# Altium PCB PCB.PcbDoc
Units mm, origin at the board's own origin, x right, y up, seen from the top; angles counter-clockwise.
Board outline 60.13 x 40 mm, 2 copper layers (Top Layer, Bottom Layer); 9 components, 7 nets, 24 pads, 0 vias.
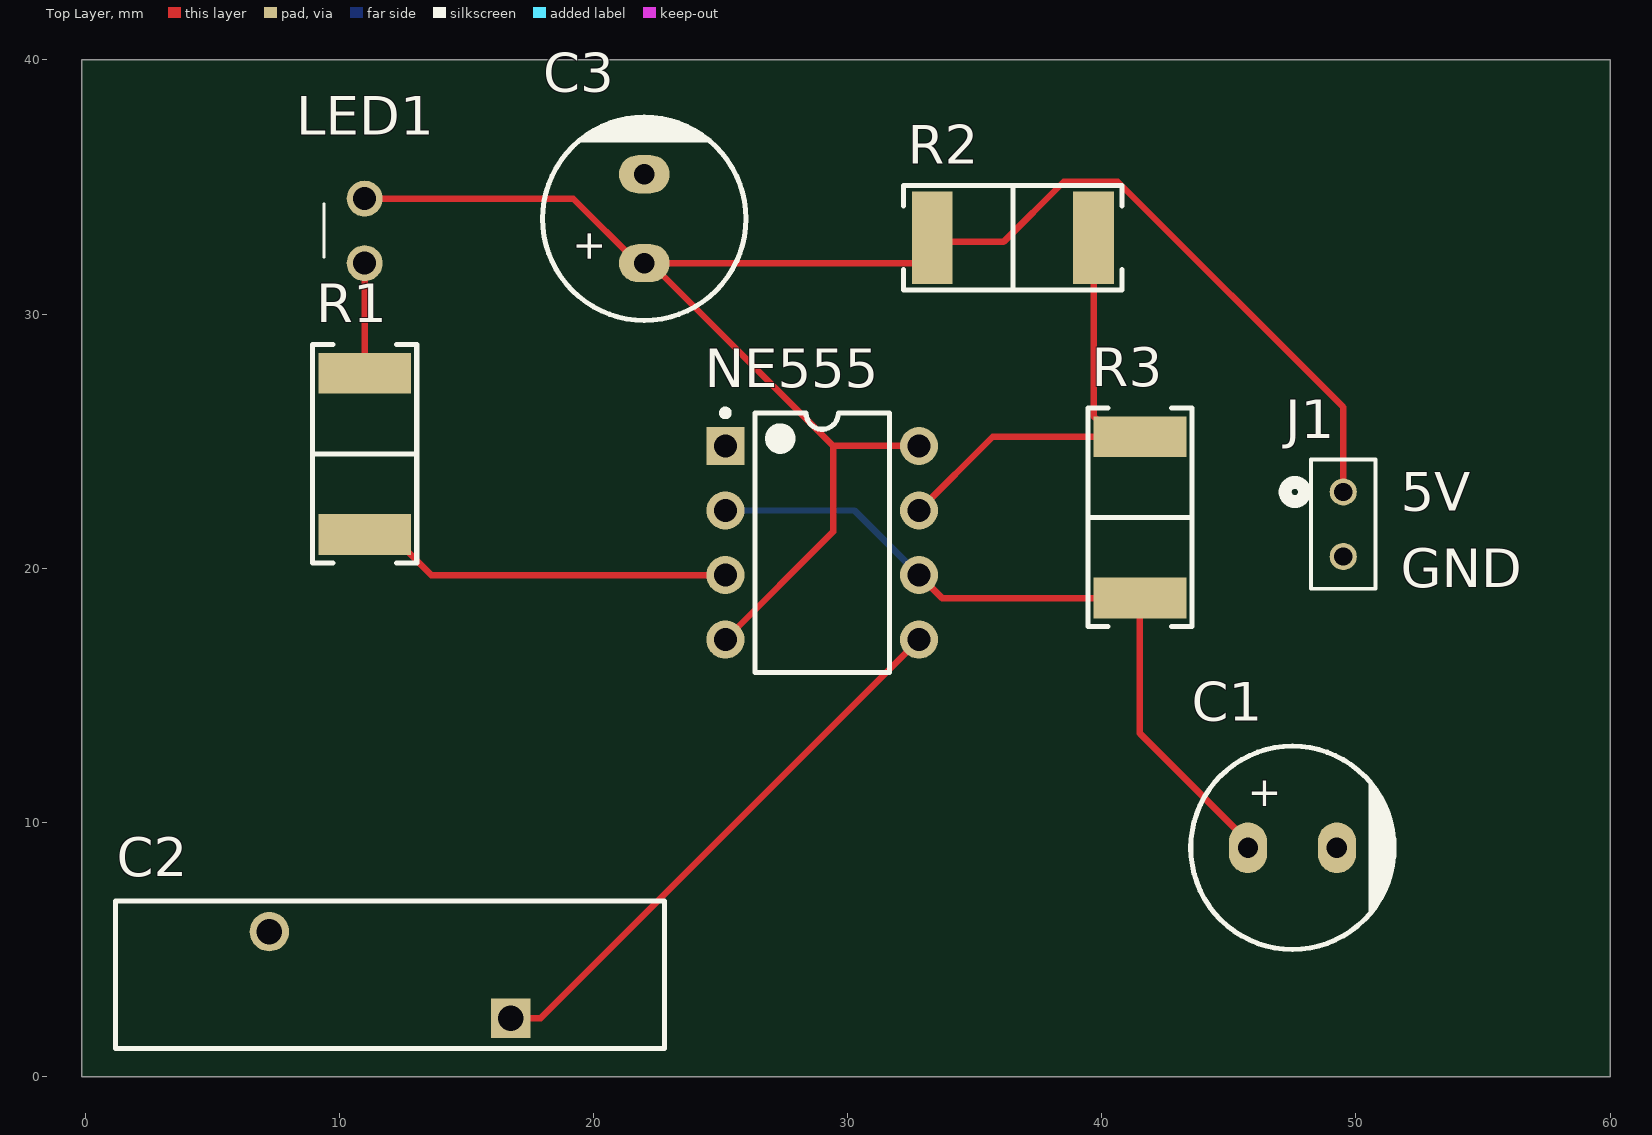
[diagram p0: Top Layer view]
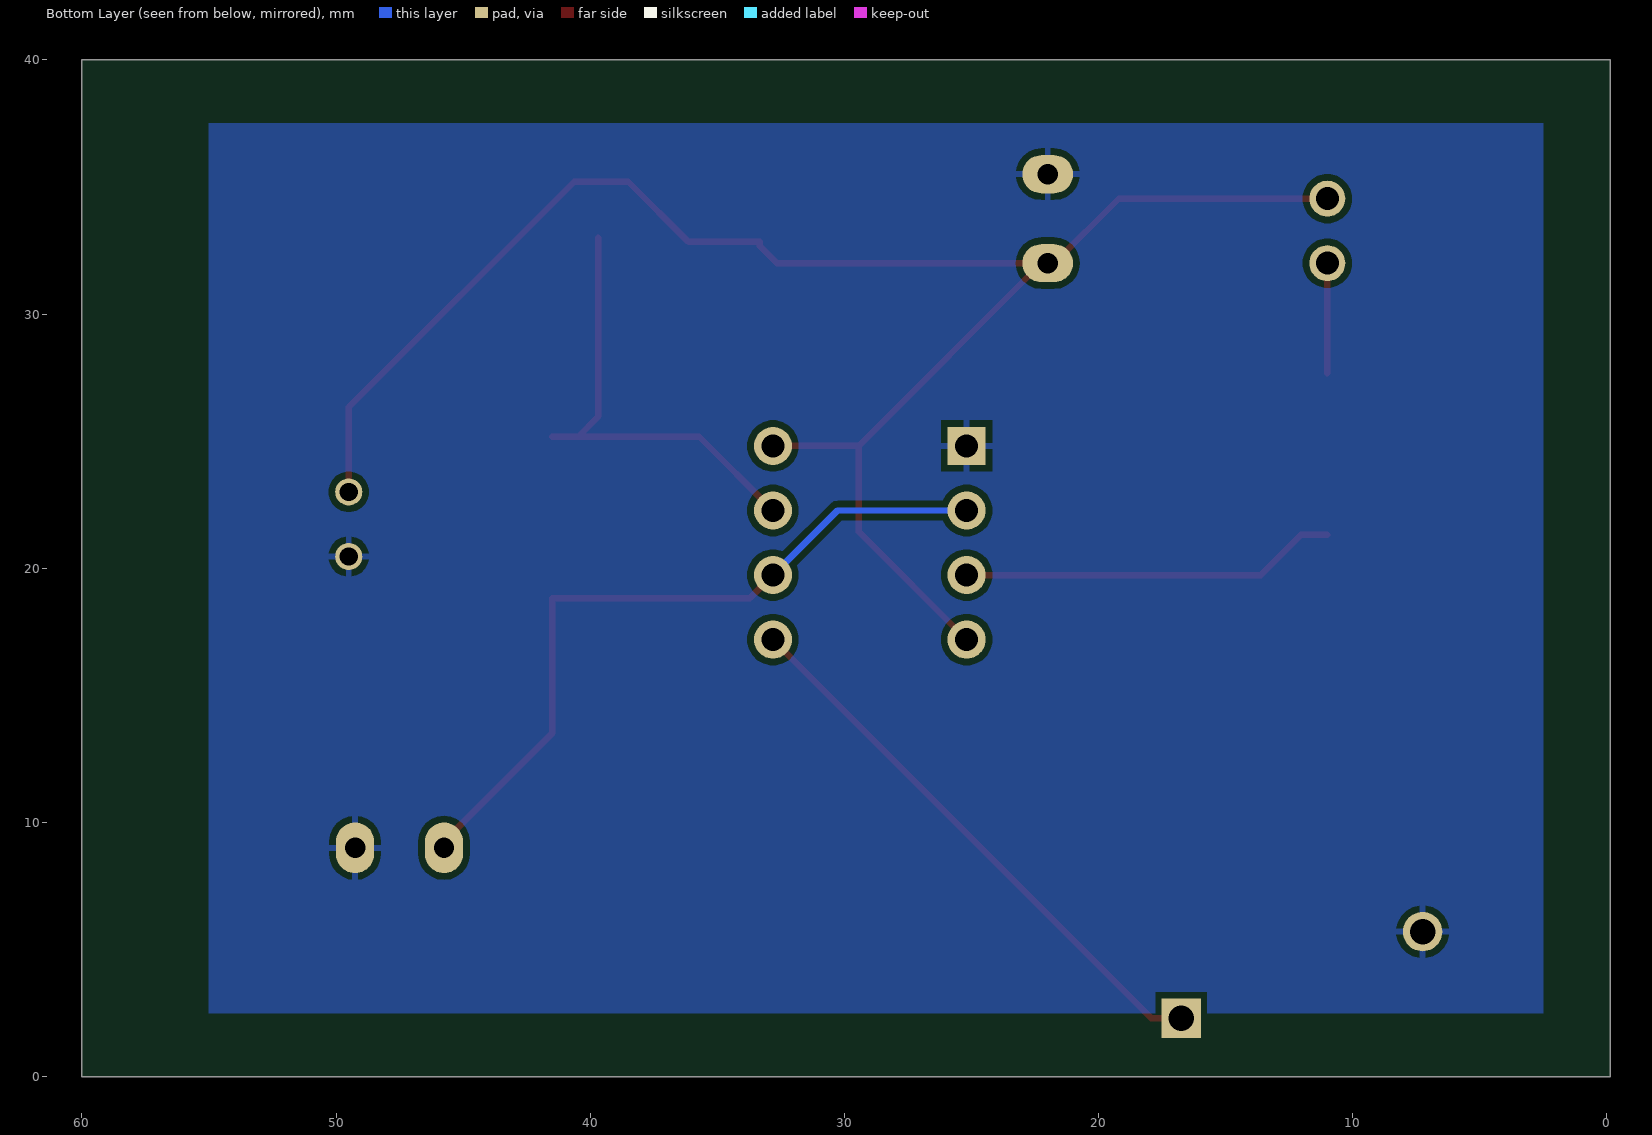
[diagram p1: Bottom Layer view, seen from below]
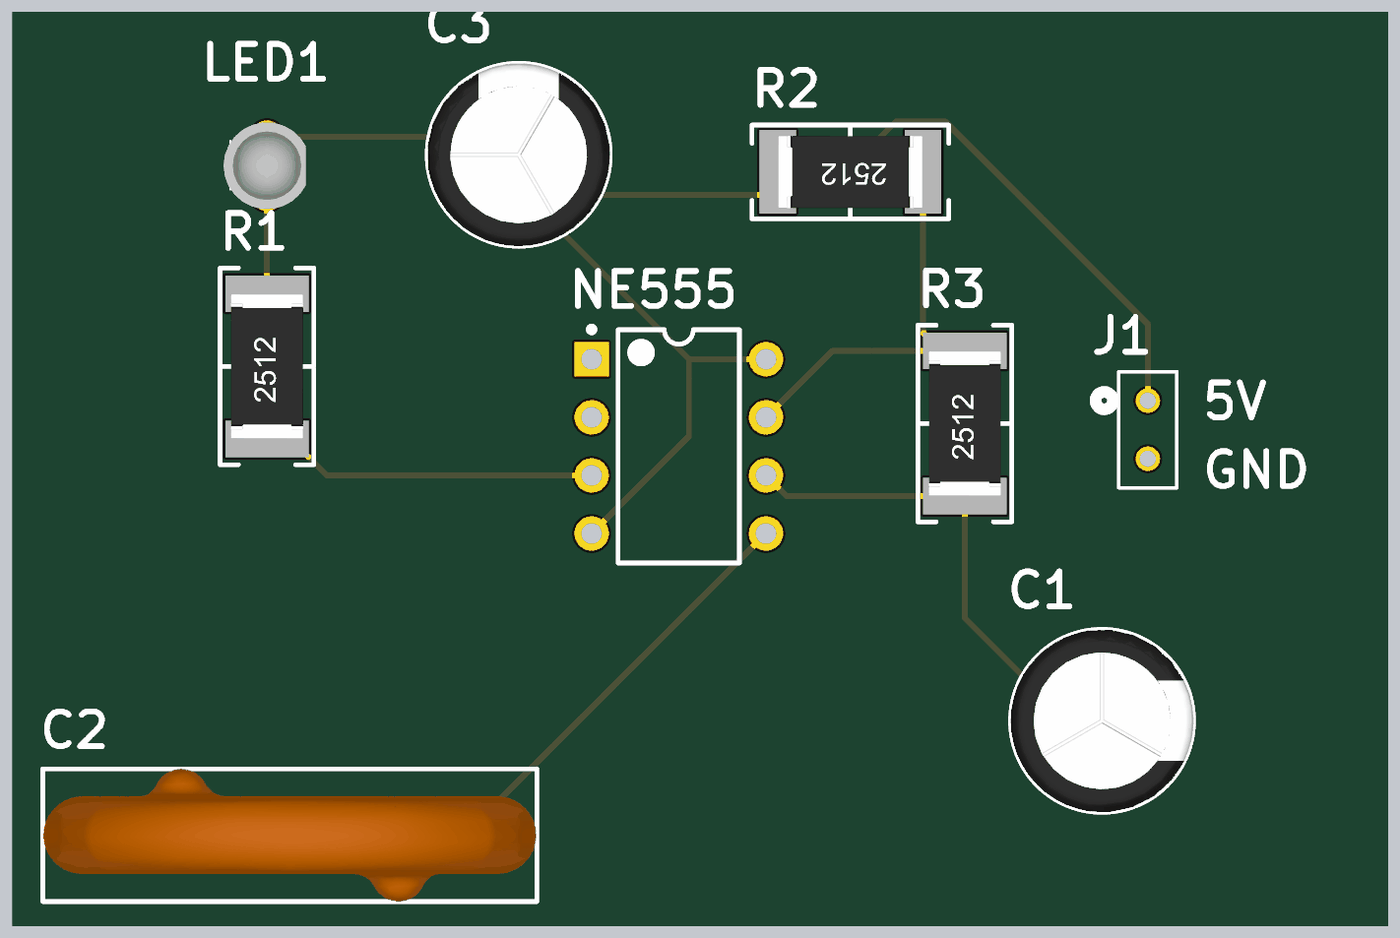
[diagram p2: 3D render of the assembled board from above, using the file's embedded part models]

## Layer stack, top to bottom
Top Solder: solder mask 0.0102, Solder Resist, Dk 3.5
Top Layer: signal copper 0.0356
Dielectric 1: dielectric 0.32, FR-4, Dk 4.8
Bottom Layer: signal copper 0.0356
Bottom Solder: solder mask 0.0102, Solder Resist, Dk 3.5

## Board outline
-0.127,0 60,0 60,40 -0.127,40

## Design rules (kind name [scope] priority, off if disabled: settings)
Clearance [All] p1: gap=0.254 ignorepadtopadclearanceinfootprint=FALSE except(0: Arc-Hole Track-Hole SMDPad-Hole THPad-Hole Via-Hole Fill-Hole Poly-Hole Region-Hole Text-Hole)
PolygonConnect [All] p1: connectstyle=Relief reliefconductorwidth=0.254 reliefentries=4 polygonreliefangle="90 Angle" airgapwidth=0.254
RoutingVias [All] p1: holewidth=0.711 width=1.27 viastyle="Through Hole" minholewidth=0.711 minwidth=1.27 maxholewidth=0.711 maxwidth=1.27
SolderMaskExpansion [All] p1: expansion=0.102 istentingtop=FALSE
Width [All] p1: maxlimit=0.254 minlimit=0.254 preferedwidth=0.254
30 further rules are at their usual default settings.

## Components (designator, comment, footprint, x,y, rotation, side; value= is the part's Value field where it differs from the comment)
C1 "10 µF" "CAP AL TH D8 L3.5 H12.5" 47.5,9 r0 top
C2 "440LS10-R" FP-440LS10-R-MFG 12,4 r180 top
C3 "10 µF" "CAP AL TH D8 L3.5 H12.5" 22,33.75 r90 top
J1 "TS-102-T-A" SAMTEC_TS-102-T-A 49.5,23 r270 top
LED1 "1254-10SURT_S530-A3" 125410SURTS530A3 11,34.54 r270 top
NE555 "NE555P" P0008A 29,21 r0 top
R1 "100 Ohms" "RES 2512_6432" 11,24.5 r90 top
R2 "1 kOhms" "RES 2512_6432" 36.5,33 r180 top
R3 "22 kOhms" "RES 2512_6432" 41.5,22 r90 top

## Footprints (in the part's own frame and the unit in brackets; to place one, negate y for a bottom-side part, rotate by r counter-clockwise, add the part's x,y. Pads: shape width x height; smd on the part's side, far side on the other; paste and mask are expansions set on the pad)
125410SURTS530A3 [mm]
  round 1.416 hole 0.91: 1(0,0) 2(2.54,0)
  silkscreen extent 0.2,-1.6 2.3,-1.6, body extent -0.63,-1.9 3.17,1.7, height 5.28
"CAP AL TH D8 L3.5 H12.5" [mm] "8MM Diameter, 3.5MM Lead Spacing Aluminium Capacitor"
  oval 1.5x2 hole 0.8: 1(-1.75,0) 2(1.75,0)
  silkscreen extent -4,-4 4,4, body extent -4,-4 4,4, height 11.5
FP-440LS10-R-MFG [mm]
  rect 1.55x1.55 hole 1 paste-1000 mask+0: 1(-4.75,1.7)
  round 1.55 hole 1 paste-1000 mask+0: 2(4.75,-1.7)
  silkscreen extent -10.8,-2.9 10.8,2.9, body extent -10.9,-3 10.9,3, height 0.25
P0008A [mm] "DIP, 8-Leads, Body 10.15x6.6mm, Pitch 2.54mm"
  rect 1.5x1.5 hole 0.9: 1(-3.81,3.81)
  round 1.5 hole 0.9: 2(-3.81,1.27) 3(-3.81,-1.27) 4(-3.81,-3.81) 5(3.81,-3.81) 6(3.81,-1.27) 7(3.81,1.27) 8(3.81,3.81)
  silkscreen extent -3.93,-5.1 2.65,5.23, body extent -3.95,-5.07 3.95,5.07, height 5.08
"RES 2512_6432" [mm] "Chip Resistor, 2-Leads, Body 6.30x3.15mm, IPC Medium Density"
  rect 1.6x3.65 smd: 1(-3.175,0) 2(3.175,0)
  silkscreen extent -4.3,-2.05 4.3,2.05, body extent -3.15,-1.57 3.15,1.57, height 0.7
SAMTEC_TS-102-T-A [mil]
  round 42 hole 28: 1(0,0) 2(100,0)
  silkscreen extent -50,-90 150,50

## Part data
C1 C3: library part UKL2A100MPD1TD, "CAP ALUM 10UF 20% 100V RADIAL", Device Package="Radial, Can", Lifetime @ Temp.="2000 Hrs @ 85°C", Manufacturer=Nichicon, Operating Temperature="-40°C ~ 85°C", Ripple Current @ High Frequency="180 mA @ 10 kHz", Ripple Current @ Low Frequency="90 mA @ 120 Hz", Supplier Part Number 1=493-10590-1-ND, Tolerance=±20%, Voltage - Rated="100 V", Applications="General Purpose", Capacitance="10 µF", ComponentLink1Description=Datasheet, ComponentLink1URL=http://nichicon-us.com/english/products/pdfs/e-ukl.pdf, ComponentLink2Description="DigiKey Link", ComponentLink2URL=https://www.digikey.com/en/products/detail/nichicon/UKL2A100MPD1TD/4317213, Height - Seated (Max)="0.492\" (12.50mm)", LastUpdated="10/26/2023 8:29:52 PM", Lead Spacing="0.138\" (3.50mm)", Lifecycle Status=Active, Minimum Order=1, Mounting Type="Through Hole", Package / Case="Radial, Can", Packaging=TapeAndBox, Part Number=UKL2A100MPD1TD, Part Status=Active, partid=7259, Polarization=Polar, Price=0.18, Series=UKL, Size / Dimension="0.315\" Dia (8.00mm)", Supplier 1=DigiKey
C2: library part CMP-02417-000073-1, "CAP CER 10000PF 760VAC Y5U RDL", Capacitance=10nF, Case/Package=Radial, Dielectric=Y5U, Max Operating Temperature=125°C, Min Operating Temperature=-30°C, Package Quantity=100, Resistor Type=Ceramic, Tolerance=20%, Voltage=760V, Voltage Rating=250V, Voltage Rating (AC)=500V, Construction=RADIAL, Contact Plating=Tin, Depth=5.8mm, Diameter=21.6mm, Dissipation Factor=2%, Height=5.8mm, Height - Seated (Max)=0.976inch, Lead Diameter=0.81mm, Lead Free="Lead Free", Lead Length=28.8mm, Lead Pitch=9.5mm, Mount="Through Hole", Number of Pins=2, Packaging=Bulk, Radiation Hardening=No, RoHS Compliant=Yes, Series=440L, Termination=Radial
J1: "Connector", Manufacturer_Name=SAMTEC, Mouser Part Number=200-TS102TA, Arrow Part Number=TS-102-T-A, Arrow Price/Stock=https://www.arrow.com/en/products/ts-102-t-a/samtec?region=nac, Manufacturer_Part_Number=TS-102-T-A, Mouser Price/Stock=https://www.mouser.co.uk/ProductDetail/Samtec/TS-102-T-A?qs=0lQeLiL1qyYw%2F4U%252Bgf8JTQ%3D%3D
LED1: "LED", Arrow Part Number=1254-10SURT/S530-A3, Manufacturer_Name=Everlight, Arrow Price/Stock=https://www.arrow.com/en/products/1254-10surts530-a3/everlight-electronics?region=nac, Datasheet Link=https://datasheet.datasheetarchive.com/originals/distributors/Datasheets-3/DSA-55877.pdf, Height=5.2mm, Manufacturer_Part_Number=1254-10SURT/S530-A3
NE555: library part CMP-2000-04954-1, "Precision Timer, 4.5 to 16 V, 0 to 70 degC, 8-Pin DIP, Pb-Free, Tube", Manufacturer=TexasInstruments, Maximum High Level Output Current=-200mA, Maximum Low Level Output Current=200mA, Operating Supply Voltage=5, Package=8PDIP, Package Description="8-Pin Double In-line Package, Body 9.59 x 6.35 mm, Pitch 2.54 mm", Package Reference=P8, Category=Timer, Datasheet URL=http://www.ti.com/general/docs/lit/getliterature.tsp?genericPartNumber=NE555&fileType=pdf, Datasheet Version="Rev. I, 09/2014", Manufacturer URL=http://www.ti.com/, Number of Internal Timers=1, Package URL=http://www.ti.com/lit/ml/mpdi001b/mpdi001b.pdf, Packaging=Rail/Tube, Rad Hard=No, Type=Standard
R1: library part CR2512-JW-101ELF, "RES SMD 100 OHM 5% 1W 2512", Device Package="2512 (6432 Metric)", Manufacturer="Bourns Inc.", Operating Temperature="-55°C ~ 155°C", Power (Watts)=1W, Supplier Device Package=2512, Supplier Part Number 1=118-CR2512-JW-101ELFCT-ND, Temperature Coefficient=±200ppm/°C, Tolerance=±5%, ComponentLink1Description=Datasheet, ComponentLink1URL=https://www.bourns.com/docs/Product-Datasheets/CR2010.pdf, ComponentLink2Description="DigiKey Link", ComponentLink2URL=http://digikey.com/product-detail/en/bourns-inc/CR2512-JW-101ELF/118-CR2512-JW-101ELFCT-ND/10673850, Composition="Thick Film", Height - Seated (Max)="0.030\" (0.75mm)", LastUpdated="9/2/2020 1:26:49 AM", Lifecycle Status=Active, Minimum Order=1, Number of Terminations=2, Package / Case="2512 (6432 Metric)", Packaging=TapeAndReel, Part Number=CR2512-JW-101ELF, Part Status=Active, Price=0.07, Resistance="100 Ohms", Series=CR2512, Size / Dimension="0.248\" L x 0.122\" W (6.30mm x 3.10mm)", Supplier 1=DigiKey
R2: library part RMCF2512FT1K00, "RES 1K OHM 1% 1W 2512", Device Package="2512 (6432 Metric)", Manufacturer="Stackpole Electronics Inc", Operating Temperature="-55°C ~ 155°C", Power (Watts)=1W, Ratings=AEC-Q200, Supplier Device Package=2512, Supplier Part Number 1=RMCF2512FT1K00CT-ND, Temperature Coefficient=±100ppm/°C, Tolerance=±1%, ComponentLink1Description=Datasheet, ComponentLink1URL=https://www.seielect.com/catalog/sei-rmcf_rmcp.pdf, ComponentLink2Description="DigiKey Link", ComponentLink2URL=http://digikey.com/product-detail/en/stackpole-electronics-inc/RMCF2512FT1K00/RMCF2512FT1K00CT-ND/2419062, Composition="Thick Film", Features="Automotive AEC-Q200", Height - Seated (Max)="0.028\" (0.70mm)", LastUpdated="2/17/2022 6:29:22 PM", Lifecycle Status=Active, Minimum Order=1, Number of Terminations=2, Package / Case="2512 (6432 Metric)", Packaging=TapeAndReel, Part Number=RMCF2512FT1K00, Part Status=Active, Price=0.04, Resistance="1 kOhms", Series=RMCF, Size / Dimension="0.248\" L x 0.126\" W (6.30mm x 3.20mm)", Supplier 1=DigiKey
R3: library part 352222KJT, "RES SMD 22K OHM 5% 3W 2512", Device Package="2512 (6432 Metric)", Manufacturer="TE Connectivity Passive Product", Operating Temperature="-55°C ~ 155°C", Power (Watts)=3W, Ratings=AEC-Q200, Supplier Part Number 1=A121190CT-ND, Temperature Coefficient=±100ppm/°C, Tolerance=±5%, ComponentLink1Description=Datasheet, ComponentLink1URL=https://www.te.com/commerce/DocumentDelivery/DDEController?Action=srchrtrv&DocNm=9-1773463-7&DocType=DS&DocLang=English, ComponentLink2Description="DigiKey Link", ComponentLink2URL=http://digikey.com/product-detail/en/te-connectivity-passive-product/352222KJT/A121190CT-ND/5245247, Composition="Thick Film", Features="Automotive AEC-Q200", Height - Seated (Max)="0.047\" (1.20mm)", LastUpdated="9/2/2020 1:27:05 AM", Lifecycle Status=Active, Minimum Order=1, Number of Terminations=2, Package / Case="2512 (6432 Metric)", Packaging=TapeAndReel, Part Number=352222KJT, Part Status=Active, Price=0.18, Resistance="22 kOhms", Series="3522, CGS", Size / Dimension="0.250\" L x 0.126\" W (6.35mm x 3.20mm)", Supplier 1=DigiKey

## Nets (pads, with @x,y where several pads share a name; then routed paths per layer and width w, separated by ;. In a path a pad name is that pad's centre, name@x,y a point inside that pad or via, vN(x,y) a via of type N, cw(c..) or ccw(c..) an arc to the next point about the centre after c; other vN are vias at no path point)
5V: C3.1 J1.1 LED1.1 NE555.4 NE555.8 R2.2 | length 70.9
  Top Layer w0.254: LED1.1 19.21,34.54 21.75,32 C3.1 C3.1@22.25,32 ; NE555.4 29.44,21.44 29.44,24.81 ; NE555.8 29.44,24.81 ; J1.1 49.5,26.339 40.633,35.206 38.5,35.206 36.131,32.837 33.325,32.837 33.325,32.673 32.652,32 C3.1@22.25,32 ; C3.1@22.25,32 29.44,24.81
GND: C1.2 C2.2 C3.2 J1.2 NE555.1
NetC1_1: C1.1 NE555.2 NE555.6 R3.1 | length 29.3
  Top Layer w0.254: NE555.6 33.715,18.825 R3.1 41.5,13.5 45.75,9.25 C1.1
  Bottom Layer w0.254: NE555.2 30.27,22.27 NE555.6
NetC2_1: C2.1 NE555.5 | length 22.2
  Top Layer w0.254: C2.1 17.92,2.3 NE555.5
NetLED1_2: LED1.2 R1.2 | length 4.3
  Top Layer w0.254: R1.2 LED1.2
NetNE555_3: NE555.3 R1.1 | length 14.9
  Top Layer w0.254: R1.1 12.025,21.325 13.62,19.73 NE555.3
NetNE555_7: NE555.7 R2.1 R3.2 | length 18
  Top Layer w0.254: NE555.7 35.715,25.175 R3.2@40.475,25.175 ; R2.1 39.675,25.975 R3.2@40.475,25.175 ; R3.2 R3.2@40.475,25.175

## Polygon pours and split planes (outlines as drawn)
GND on Bottom Layer "GND_L02_P001" (solid, pour order 1): 2.5,37.5 2.5,2.5 55,2.5 55,37.5

## Silkscreen, mask and mechanical layers (free items; w line width, h text height)
Top Overlay:
  text "5V" at 51.754,22.254 h1.52
  text "GND" at 51.754,19.254 h1.52

## Text inside footprints (layer, text, board x,y; h text height)
C1: Top Overlay "+" at 45.75,10.25 h2
C3: Top Overlay "+" at 20.75,32 h2 r90